# EAGLE board PIC32 (EAGLE 8.5.1)
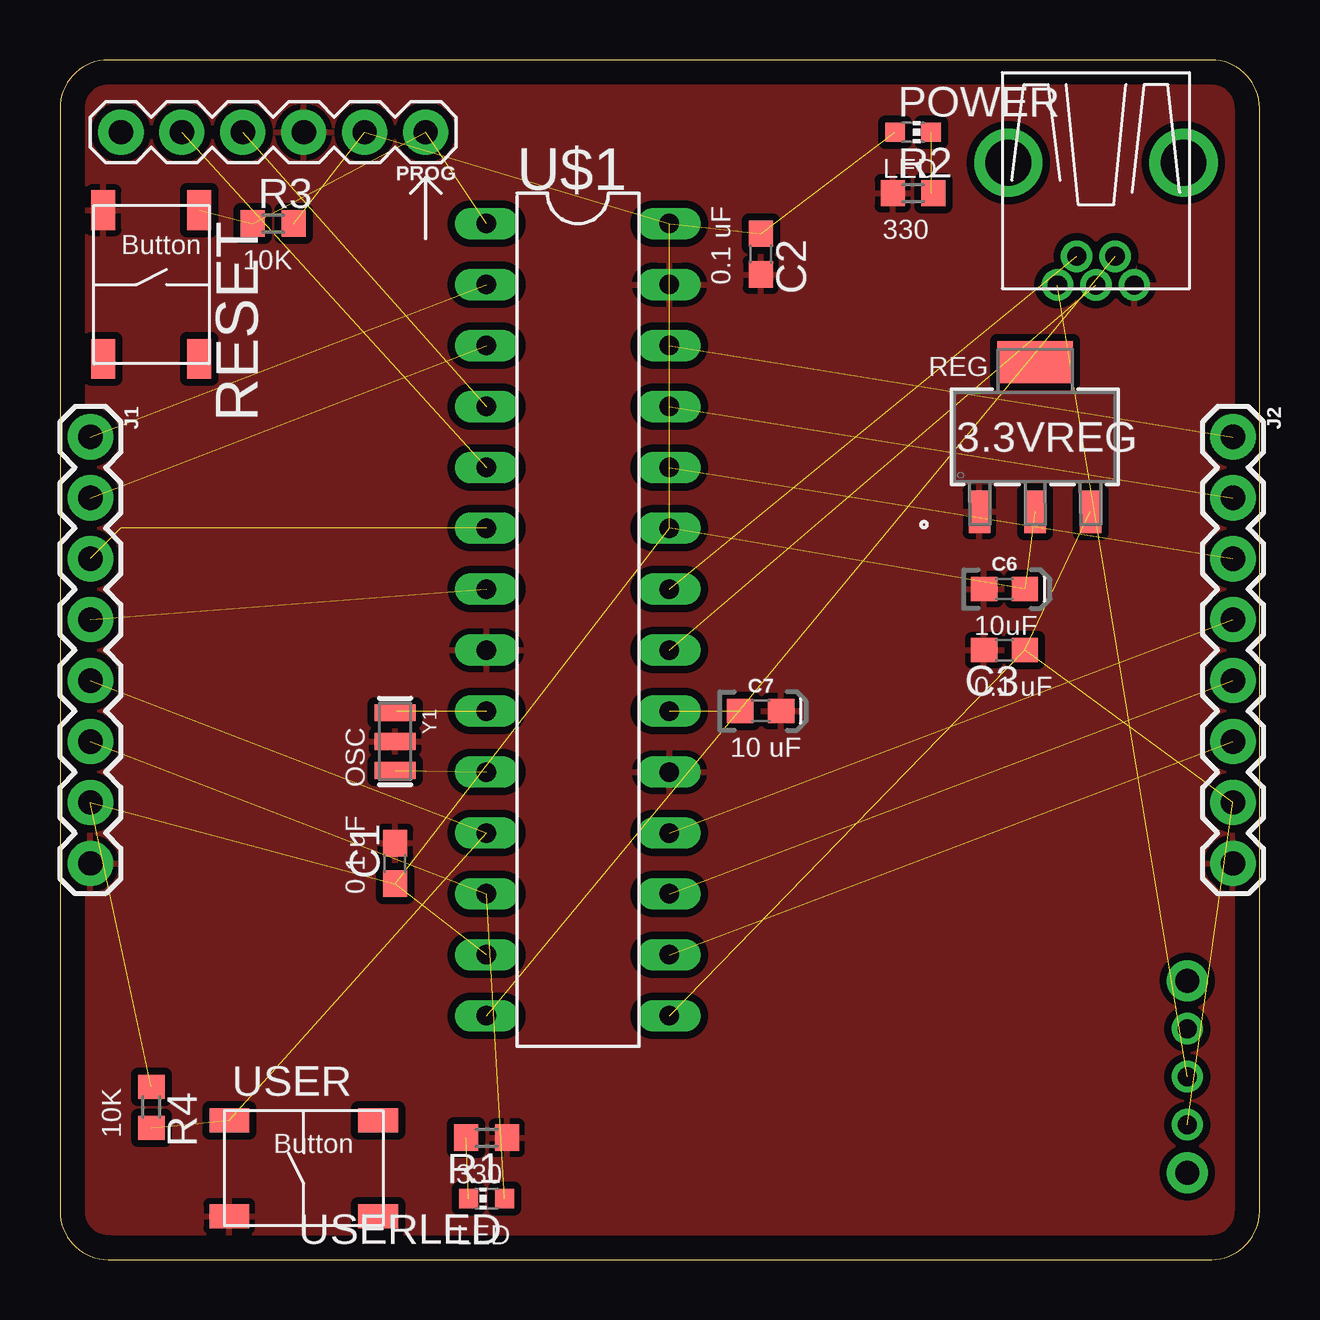
[diagram p0: board, top side]
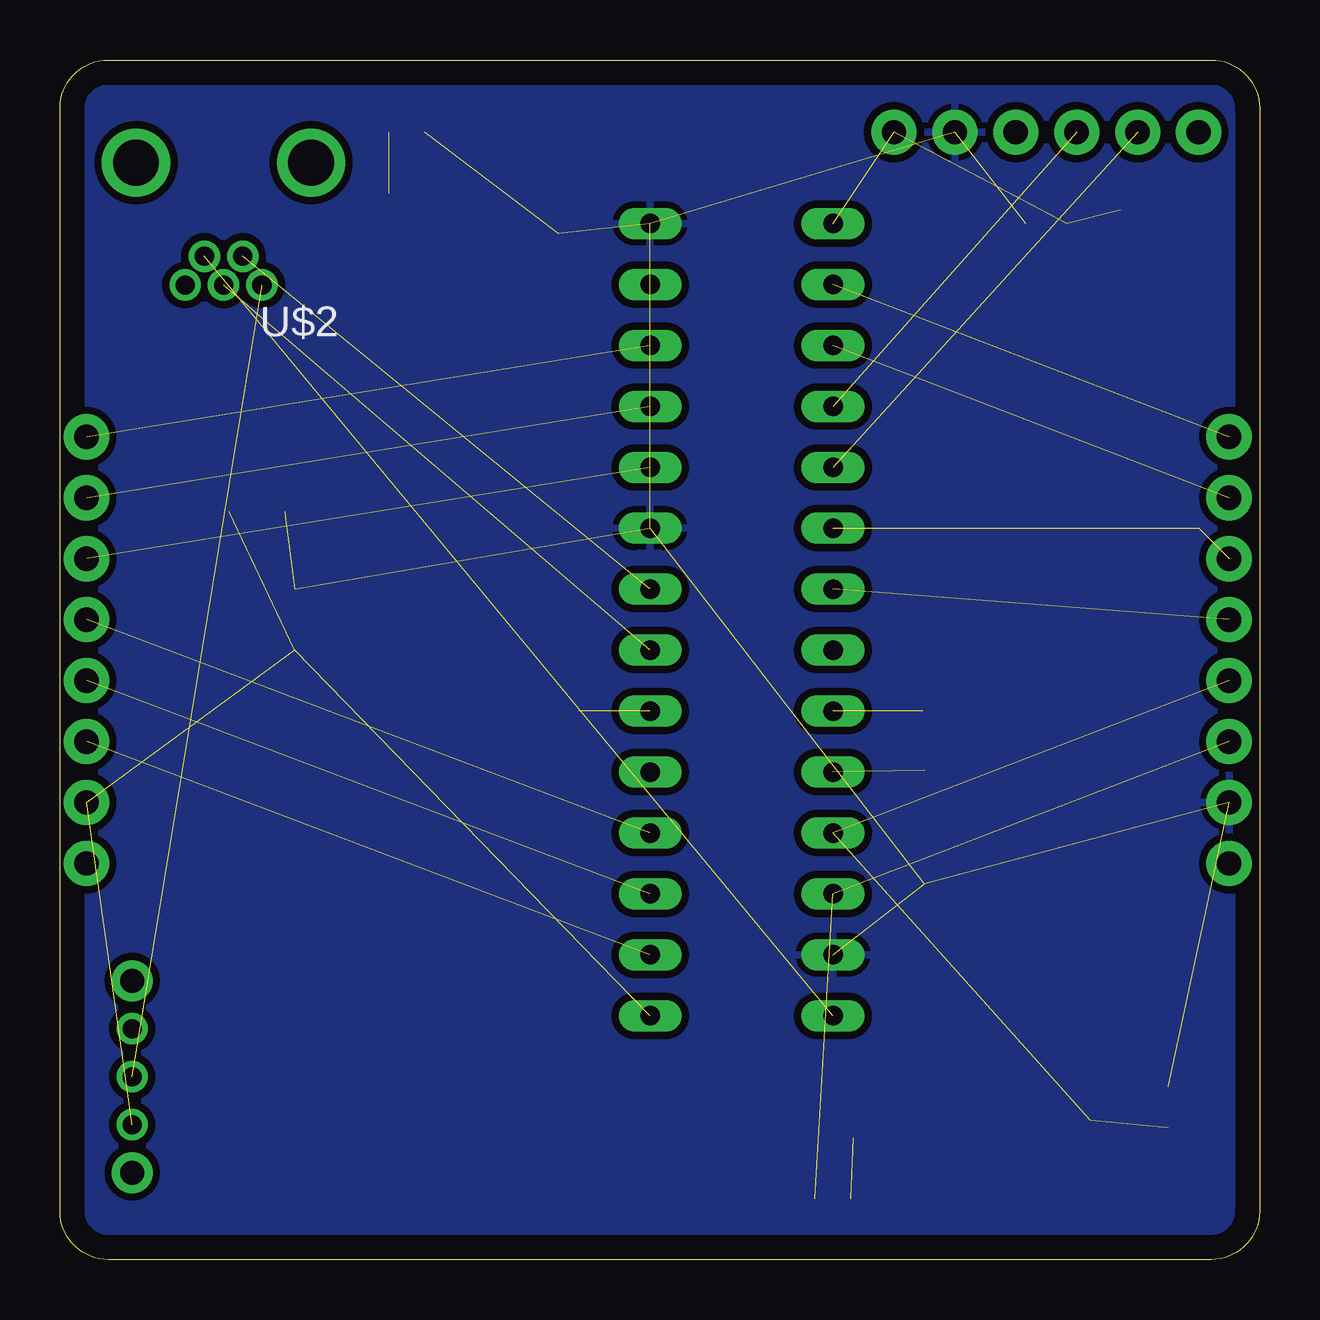
[diagram p1: board, bottom side, seen from below]

Size 50 x 50 mm. Coordinates in mm from the lower left corner, seen from the top.
Outline: 0,2 arc90 2,0 48,0 arc90 50,2 50,48 arc90 48,50 2,50 arc90 0,48 0,2
Copper layers (1*16): Top 0.035mm / dielectric 1.5mm / Bottom 0.035mm
Design rules "default": minimum track width 6mil, minimum drill 0.35mm, track to track 6mil, track to pad 6mil, pad to pad 6mil, via to via 6mil, smd to smd 6mil, copper to edge 40mil, drill to drill 6mil, minimum pad ring 10mil, minimum via ring 8mil, stop-mask expansion 4mil, vias tented up to drill 0mil, thermal gap 10mil

## Footprints (pad centres in the part's own frame; a part is rotated, then mirrored left to right if it is on the bottom)
DCY4 = smd 0.889 x 1.765: 1 -2.311,-3.118; 2 0,-3.118; 3 2.311,-3.118 | smd 3.15 x 1.765: 4 0,3.118
C0603 = smd 1.1 x 1: 1 -0.85,0; 2 0.85,0
0603-POLAR = smd 1.1 x 1: + 0.85,0; - -0.85,0
1X08 = drill 1.016 pad 1.88: 1 0,0; 2 2.54,0; 3 5.08,0; 4 7.62,0; 5 10.16,0; 6 12.7,0; 7 15.24,0; 8 17.78,0
NU32V7_MOM_SW = smd 1.65 x 1: 1.B -3.1,2; 2.A -3.1,-2; 3.A' 3.1,-2; 4.B' 3.1,2
CHIP-LED0603 = smd 0.8 x 0.8: A 0,-0.75; C 0,0.75
SLIDE_SWITCH = drill 0.8 pad 1.3: IN 0,0; OUT1 -2,0; OUT2 2,0 | drill 1 pad 1.7: P$4 4,0; P$5 -4,0
1X06_NO_SILK = drill 1.016 pad 1.88: 1 0,0; 2 2.54,0; 3 5.08,0; 4 7.62,0; 5 10.16,0; 6 12.7,0
R0603 = smd 1 x 1.1: 1 -0.85,0; 2 0.85,0
DIL28-3 = drill 0.813 long: 1 -1.27,34.29; 2 -1.27,31.75; 3 -1.27,29.21; 4 -1.27,26.67; 5 -1.27,24.13; 6 -1.27,21.59; 7 -1.27,19.05; 8 -1.27,16.51; 9 -1.27,13.97; 10 -1.27,11.43; 11 -1.27,8.89; 12 -1.27,6.35; 13 -1.27,3.81; 14 -1.27,1.27; 15 6.35,1.27; 16 6.35,3.81; 17 6.35,6.35; 18 6.35,8.89; 19 6.35,11.43; 20 6.35,13.97; 21 6.35,16.51; 22 6.35,19.05; 23 6.35,21.59; 24 6.35,24.13; 25 6.35,26.67; 26 6.35,29.21; 27 6.35,31.75; 28 6.35,34.29
USB-MB-H = drill 0.8: D+ 5.1,0; D- 3.9,0.8; GND 5.1,-1.6; ID 3.9,-0.8; VBUS 5.1,1.6 | drill 1.9: P$6 0,-3.65; P$7 0,3.65
RESONATOR-SMD = smd 0.7 x 1.7: 1 -1.2,0; 2 0,0; 3 1.2,0

## Placement (x,y rotation side)
3.3VREG  TLV1117-33CDCYR  [DCY4]  40.64,34.29 0 top
C1  0.1uF  [C0603]  13.97,16.51 90 top
C2  0.1uF  [C0603]  29.21,41.91 270 top
C3  0.1uF  [C0603]  39.37,25.4 180 top
C6  10uF  [0603-POLAR]  39.37,27.94 0 top
C7  10uF  [0603-POLAR]  29.21,22.86 0 top
J1  [1X08]  1.27,34.29 270 top
J2  [1X08]  48.9,34.29 270 top
MCLR  NU32V7_MOM_SW  [NU32V7_MOM_SW]  3.81,40.64 270 top
POWER  Red  [CHIP-LED0603]  35.56,46.99 270 top
POWERSWITCH  SLIDE_SWITCH  [SLIDE_SWITCH]  46.99,7.62 270 bottom
PROG  [1X06_NO_SILK]  15.24,46.99 180 top
R1  330  [R0603]  17.78,5.08 180 top
R2  330  [R0603]  35.56,44.45 0 top
R3  10k  [R0603]  8.89,43.18 0 top
R4  10k  [R0603]  3.81,6.35 270 top
U$1  PIC32  [DIL28-3]  19.05,8.89 0 top
U$2  USB_MINI  [USB-MB-H]  43.18,45.72 270 bottom
USER  NU32V7_MOM_SW  [NU32V7_MOM_SW]  10.16,3.81 0 top
USERLED  Green  [CHIP-LED0603]  17.78,2.54 90 top
Y1  RESONATORSMD  [RESONATOR-SMD]  13.97,21.59 270 top

## Library data of the parts
3.3VREG = ME433; MANUFACTURER_PART_NUMBER: TLV111733CDCYR; VENDOR: Texas Instruments
C1-C3 R1-R4 = resistor
C6 C7 = SparkFun-Capacitors; PROD_ID: CAP-13210
J1 J2 = SparkFun-Connectors; PROD_ID: CONN-08438
MCLR USER Y1 = NU32v7
POWER USERLED = led
POWERSWITCH U$1 = ME433
PROG = SparkFun-Connectors; PROD_ID: CONN-08437
U$2 = usb_conn

## Nets
3.3V: 3.3VREG.2 C1.1 C2.1 C6.+ J1.7 POWER.A PROG.2 R3.2 R4.1 U$1.13 U$1.23 U$1.28
5V: 3.3VREG.3 C3.1 J2.7 POWERSWITCH.OUT2 U$1.15
A0: J1.1 U$1.2
A1: J1.2 U$1.3
A4: J1.6 U$1.12 USERLED.A
B2: J1.3 U$1.6
B3: J1.4 U$1.7
B4: J1.5 R4.2 U$1.11 USER.1.B
B7: J2.6 U$1.16
B8: J2.5 U$1.17
B9: J2.4 U$1.18
B13: J2.3 U$1.24
B14: J2.2 U$1.25
B15: J2.1 U$1.26
D+: U$1.21 U$2.D+
D-: U$1.22 U$2.D-
GND: 3.3VREG.1 C1.2 C2.2 C3.2 C6.- C7.+ J1.8 J2.8 MCLR.2.A PROG.3 R1.1 R2.1 U$1.8 U$1.19 U$1.27 U$2.GND USER.2.A Y1.2
MCLR: MCLR.1.B PROG.1 R3.1 U$1.1
N$1: U$1.10 Y1.3
N$2: C7.- U$1.20
N$3: U$1.9 Y1.1
N$4: PROG.6
N$5: POWER.C R2.2
N$6: R1.2 USERLED.C
PGC: PROG.4 U$1.4
PGD: PROG.5 U$1.5
USBID: U$1.14 U$2.ID
VBUS: POWERSWITCH.IN U$2.VBUS

## Tracks (layer width: path | path; a pad name or v marks a point on that pad's centre or on a via)
3.3V  (11 unrouted)
  pour Bottom (isolate 0.305): 0,0 49.53,0 50.8,1.27 50.8,49.53 49.53,50.8 46.99,50.8 0,50.8
5V  (4 unrouted)
  Top 0.305: 43.11,31.33 3.3VREG.3
A0  (1 unrouted)
A1  (1 unrouted)
A4  (2 unrouted)
B2  (2 unrouted)
B3  (1 unrouted)
B4  (3 unrouted)
B7  (1 unrouted)
B8  (1 unrouted)
B9  (1 unrouted)
B13  (1 unrouted)
B14  (1 unrouted)
B15  (1 unrouted)
D+  (1 unrouted)
D-  (1 unrouted)
GND
  pour Top (isolate 0.305, rank 6): 0,0 0,50.8 50.8,50.8 50.8,49.53 50.8,0
MCLR  (3 unrouted)
N$1  (1 unrouted)
N$2  (1 unrouted)
N$3  (1 unrouted)
  Top 0.305: Y1.1 14.04,22.86
N$5  (1 unrouted)
  Top 0.305: 36.31,44.45 R2.2
N$6  (1 unrouted)
PGC  (1 unrouted)
PGD  (1 unrouted)
USBID  (1 unrouted)
VBUS  (1 unrouted)

## Text on the board
tPlace: LED | 330 | Button | 10K | 0.1 uF | REG | RESET | 10uF | 0.1 uF | 10 uF | OSC | 0.1 uF | 10K | Button | 330 | LED